# Altium PCB Key Panel 030602.PcbDoc
Units mm, origin at the board's own origin, x right, y up, seen from the top; angles counter-clockwise.
Board outline 85.73 x 53.97 mm, 2 copper layers (Top Layer, Bottom Layer); 46 components, 37 nets, 135 pads, 39 vias.
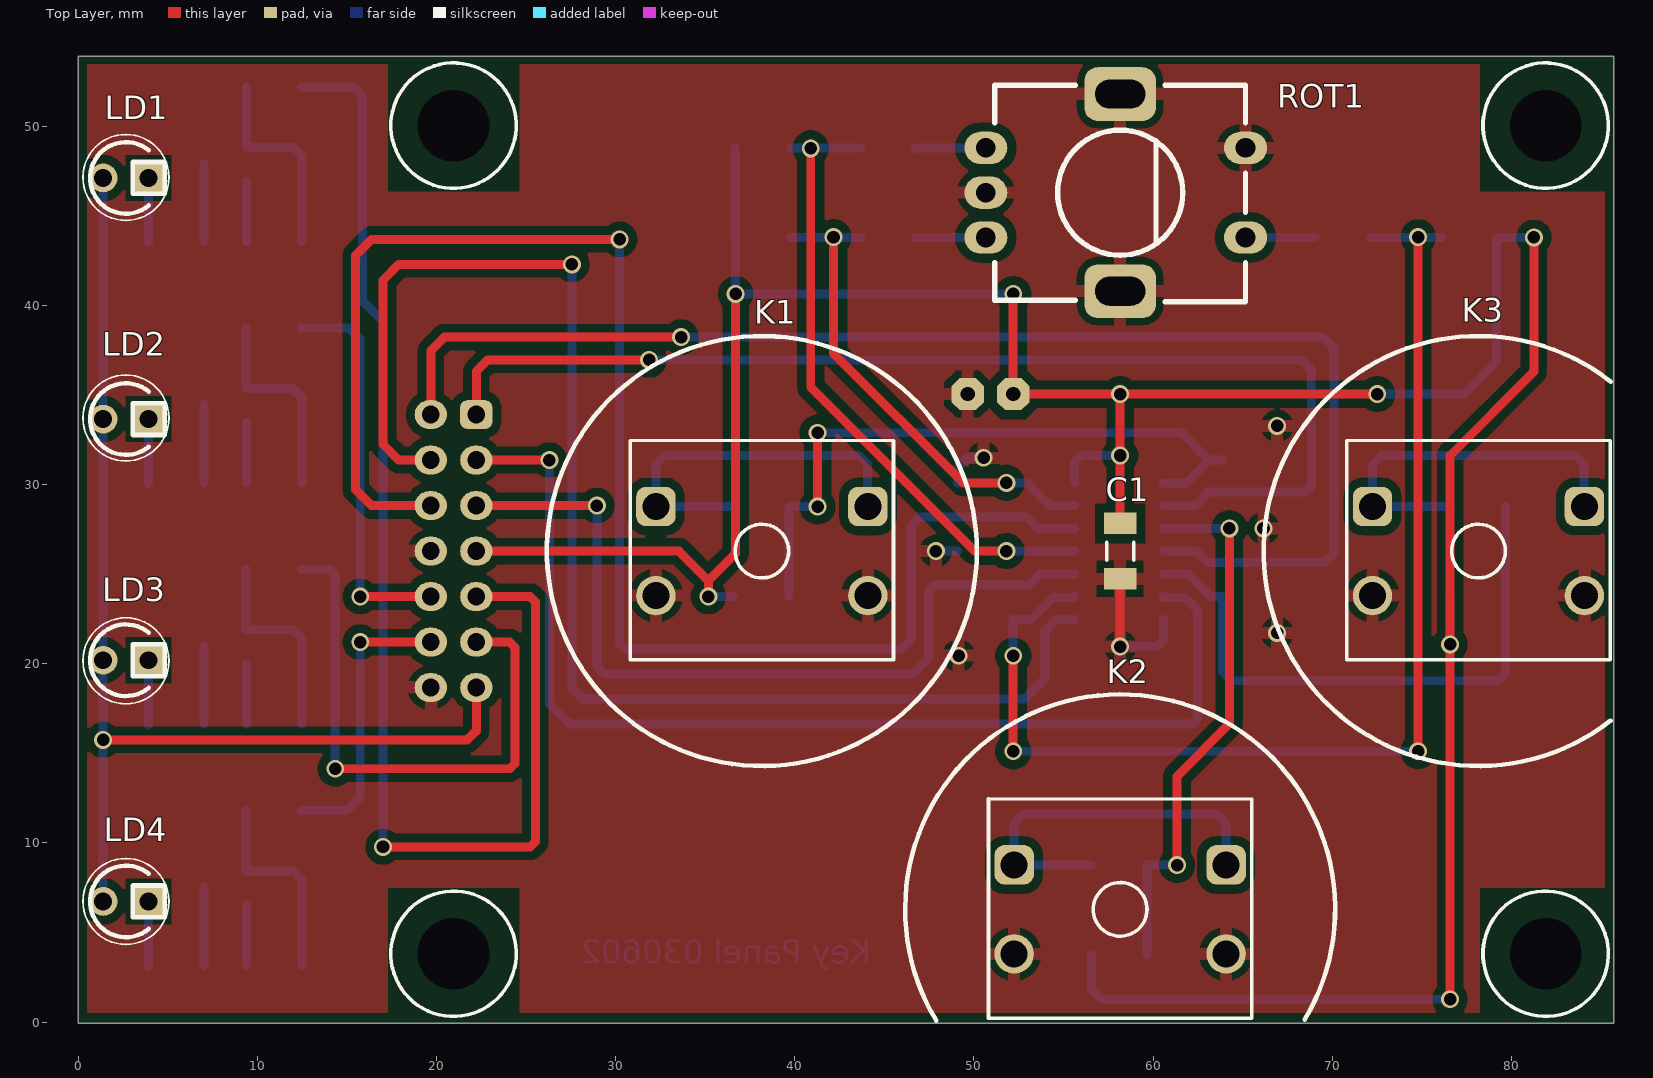
[diagram p0: Top Layer view]
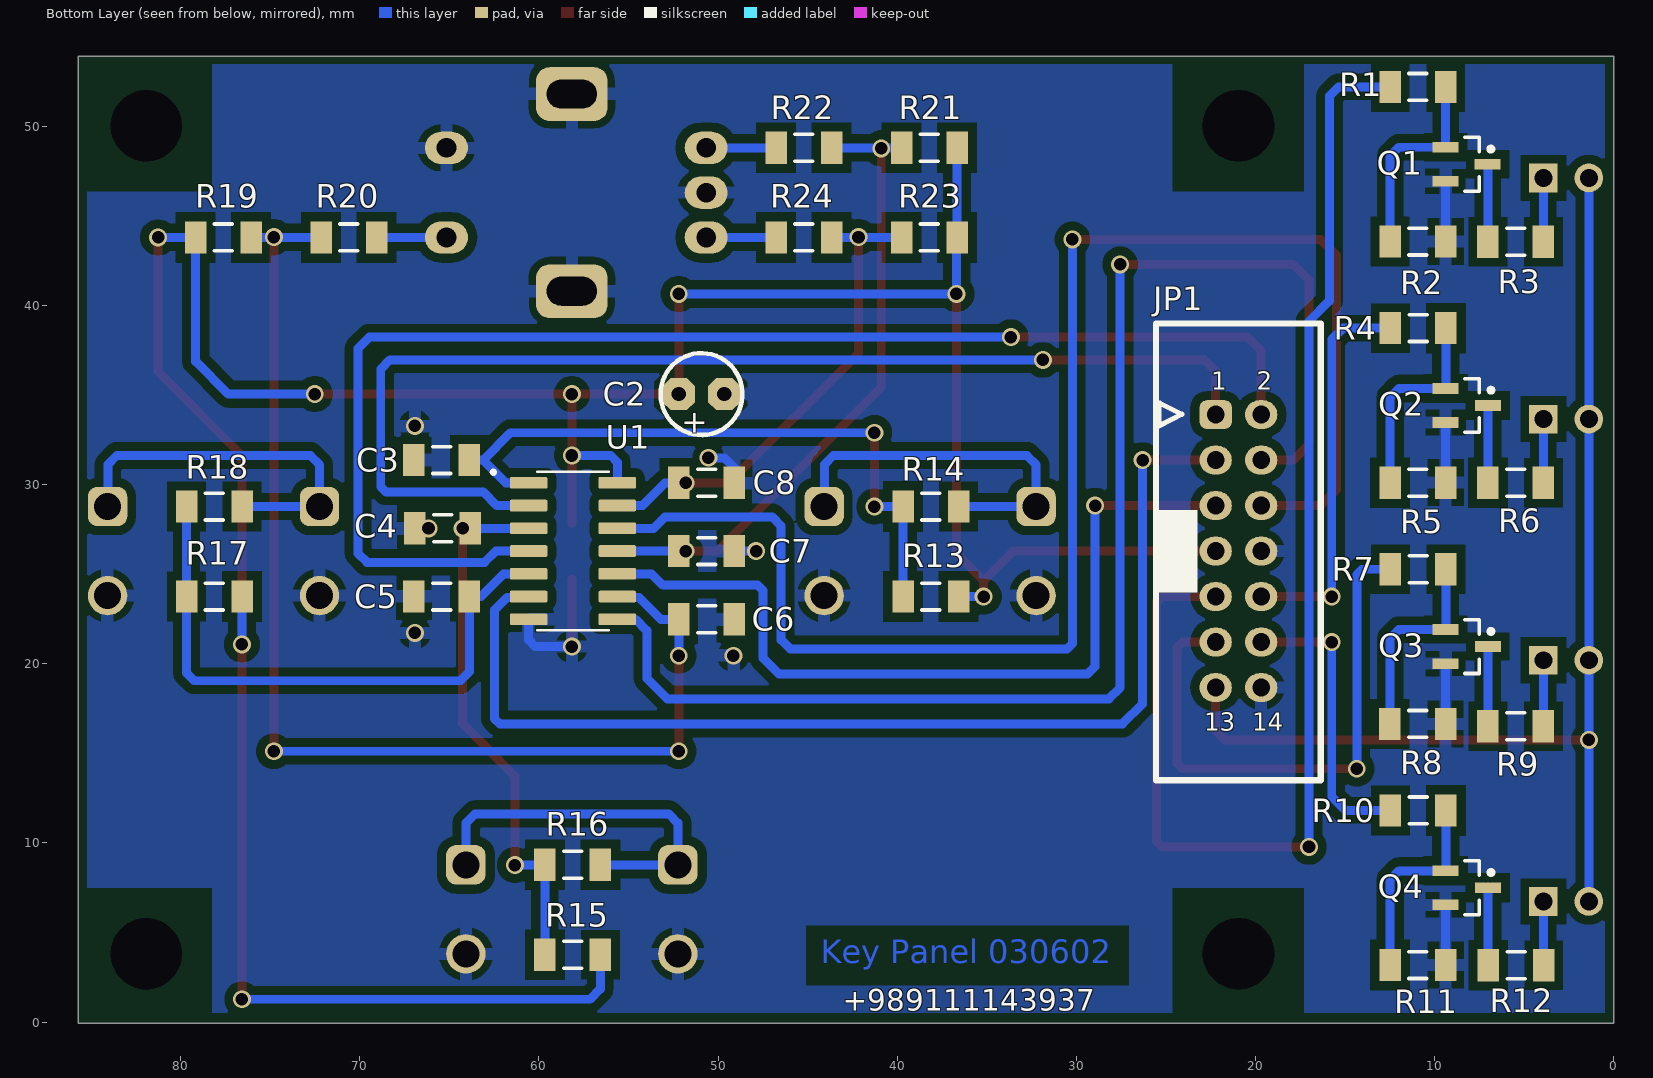
[diagram p1: Bottom Layer view, seen from below]
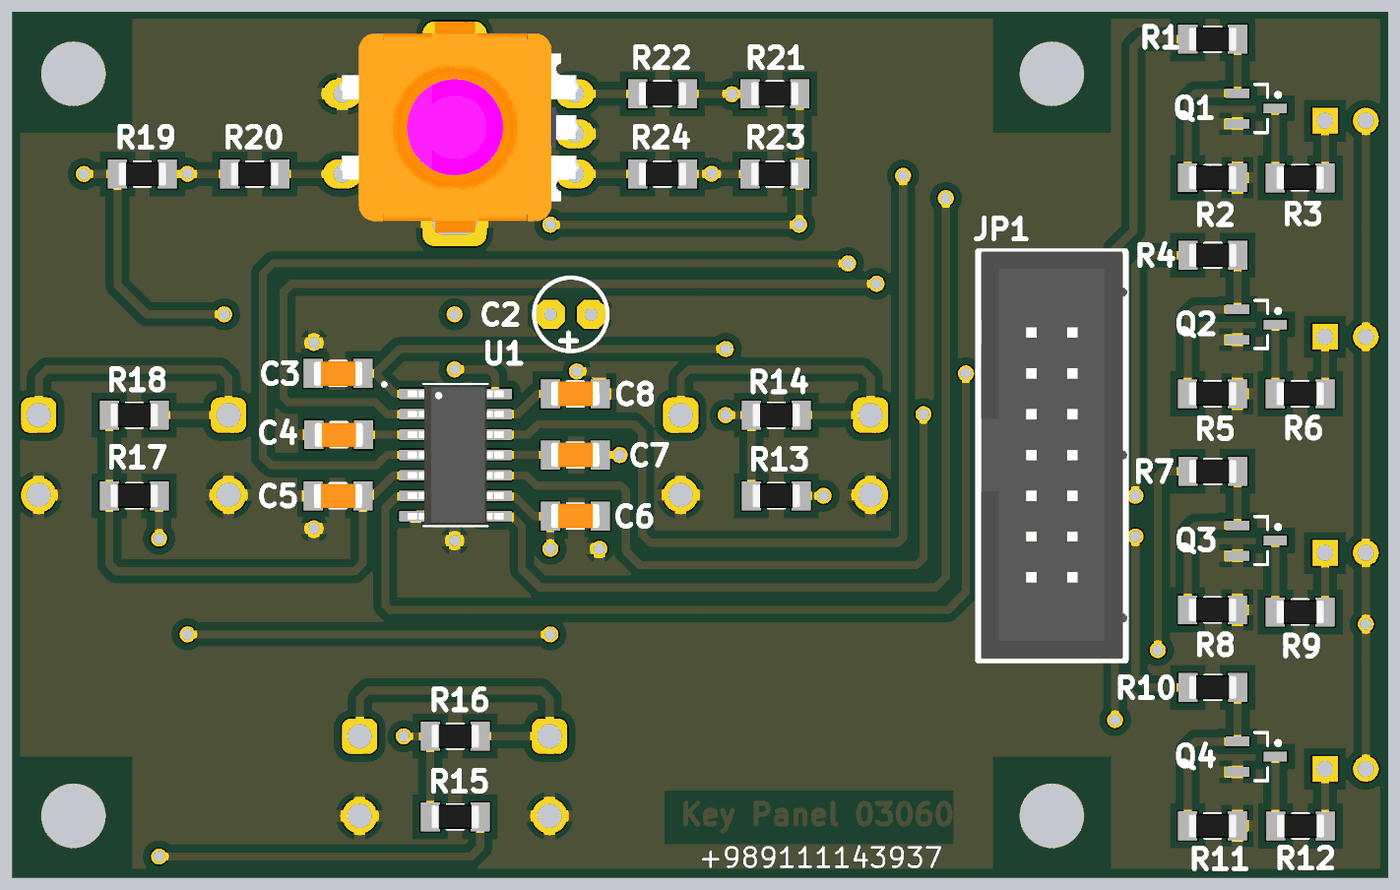
[diagram p2: 3D render of the assembled board from below, using the file's embedded part models]

## Layer stack, top to bottom
Top Solder: solder mask 0.0102, Solder Resist, Dk 3.5
Top Layer: signal copper 0.0356
Dielectric 1: dielectric 0.32, FR-4, Dk 4.8
Bottom Layer: signal copper 0.0356
Bottom Solder: solder mask 0.0102, Solder Resist, Dk 3.5

## Board outline
0,-0.059 0,53.916 85.725,53.916 85.725,-0.059

## Design rules (kind name [scope] priority, off if disabled: settings)
Clearance [All] p1: gap=0.5 ignorepadtopadclearanceinfootprint=FALSE
PlaneClearance [All] p1: clearance=0.4
PolygonConnect [All] p1: connectstyle=Relief reliefconductorwidth=0.7 reliefentries=4 polygonreliefangle="90 Angle" airgapwidth=0.4
RoutingVias [All] p1: holewidth=0.8 width=1 viastyle="Through Hole" minholewidth=0.5 minwidth=0.6 maxholewidth=1.8 maxwidth=2
SolderMaskExpansion [All] p1: expansion=0.102 istentingtop=FALSE
Width [All] p1: maxlimit=1 minlimit=0.3 preferedwidth=0.5 minimp=50.000000 maximp=50.000000 favimp=50.000000
29 further rules are at their usual default settings.

## Components (designator, comment, footprint, x,y, rotation, side; value= is the part's Value field where it differs from the comment)
C1 "100n" SMD_CAP_1206. 58.166,26.289 r90 top
C2 "10M/25" CAP1p 52.197,35.052 r180 bottom
C3 "100N" SMD_CAP_1206. 65.43,31.369 r180 bottom
C4 "100N" SMD_CAP_1206. 65.38,27.559 r180 bottom
C5 "100N" SMD_CAP_1206. 65.43,23.749 r180 bottom
C6 "100N" SMD_CAP_1206. 50.648,22.479 r0 bottom
C7 "100N" SMD_CAP_1206. 50.648,26.289 r0 bottom
C8 "100N" SMD_CAP_1206. 50.648,30.099 r0 bottom
JP1 "Key LED" IDC14-BOX 20.955,26.289 r180 bottom
K1 "Left" SW-12*14 38.166,26.289 r0 top locked
K2 "Left" SW-12*14 58.166,6.289 r0 top locked
K3 "Left" SW-12*14 78.166,26.289 r0 top locked
LD1 "Red" LED3 2.667,47.117 r0 top
LD2 "Red" LED3 2.667,33.655 r0 top
LD3 "Red" LED3 2.667,20.193 r0 top
LD4 "Red" LED3 2.667,6.731 r0 top
Q1 "2N2222" 2N2222 9.917,47.979 r270 bottom
Q2 "2N2222" 2N2222 9.911,34.517 r270 bottom
Q3 "2N2222" 2N2222 9.911,21.055 r270 bottom
Q4 "2N2222" 2N2222 9.911,7.593 r270 bottom
R1 "5K" "RES 1206" 10.935,52.197 r0 bottom
R2 "10K" "RES 1206" 10.941,43.567 r0 bottom
R3 "470R" "RES 1206" 5.486,43.561 r180 bottom
R4 "5K" "RES 1206" 10.929,38.735 r0 bottom
R5 "10K" "RES 1206" 10.941,30.105 r0 bottom
R6 "470R" "RES 1206" 5.486,30.099 r180 bottom
R7 "5K" "RES 1206" 10.929,25.273 r0 bottom
R8 "10K" "RES 1206" 10.947,16.637 r0 bottom
R9 "470R" "RES 1206" 5.486,16.51 r180 bottom
R10 "5K" "RES 1206" 10.929,11.811 r0 bottom
R11 "10K" "RES 1206" 10.941,3.181 r0 bottom
R12 "470R" "RES 1206" 5.461,3.175 r180 bottom
R13 "10K" "RES 1206" 38.125,23.749 r180 bottom
R14 "10K" "RES 1206" 38.125,28.774 r180 bottom
R15 "10K" "RES 1206" 58.125,3.749 r180 bottom
R16 "10K" "RES 1206" 58.125,8.774 r180 bottom
R17 "10K" "RES 1206" 78.125,23.749 r180 bottom
R18 "10K" "RES 1206" 78.125,28.774 r180 bottom
R19 "10K" "RES 1206" 77.619,43.796 r0 bottom
R20 "10K" "RES 1206" 70.618,43.796 r180 bottom
R21 "10K" "RES 1206" 38.213,48.796 r180 bottom
R22 "10K" "RES 1206" 45.214,48.796 r180 bottom
R23 "10K" "RES 1206" 38.213,43.796 r0 bottom
R24 "10K" "RES 1206" 45.214,43.796 r180 bottom
ROT1 "Alps Rotary" EC11 58.166,46.296 r270 top locked
U1 "CD40106BE" SOIC-14PIN 58.104,26.255 r180 bottom locked

## Footprints (in the part's own frame and the unit in brackets; to place one, negate y for a bottom-side part, rotate by r counter-clockwise, add the part's x,y. Pads: shape width x height; smd on the part's side, far side on the other; paste and mask are expansions set on the pad)
2N2222 [mm] "SOT_23"
  rect 0.6x1.45 smd: 1(-0.85,0.525) 2(1.05,0.525) 3(0.1,2.875)
  silkscreen extent -1.4,1.6 1.6,3.17, body extent -1.4,1 1.6,2.4, height 1.1
CAP1p [mm]
  oct 1.8x1.8 hole 0.8: 1(0,0) 2(2.54,0)
  silkscreen extent -1.02,-2.29 3.55,2.29
EC11 [mm]
  oval 1.8x2.4 hole 1.1: 1(-2.5,-7.5) 2(0,-7.5) 3(2.5,-7.5) 4(-2.5,7) 5(2.5,7)
  rrect50% 3x4 hole 1.6 slot 2.8 at 90 deg: 6(-5.5,0) 7(5.5,0)
  silkscreen extent -6,-7 6.1,7, body extent -6.54,-7.75 6.56,7.2, height 24.5
IDC14-BOX [mm]
  rrect50% 1.8x1.6 hole 1: 1(-1.27,7.62)
  oval 1.8x1.6 hole 1: 2(1.27,7.62) 3(-1.27,5.08) 4(1.27,5.08) 5(-1.27,2.54) 6(1.27,2.54) 7(-1.27,0) 8(1.27,0) 9(-1.27,-2.54) 10(1.27,-2.54) 11(-1.27,-5.08) 12(1.27,-5.08) 13(-1.27,-7.62) 14(1.27,-7.62)
  silkscreen extent -4.6,-12.8 4.6,12.7, body extent -4.4,-12.69 4.7,12.69, height 3.1
LED3 [mm]
  round 1.6 hole 1: 1(-1.27,0)
  rect 1.6x1.6 hole 1: 2(1.27,0)
  silkscreen extent -2,-2 2.16,2
"RES 1206" [mm] "Chip Resistor, 2-Leads, Body 3.2x1.6mm, IPC High Density _ (0.125 W)"
  rect 1.2x1.8 smd: 1(-1.549,0) 2(1.549,0)
  silkscreen extent -0.5,-0.75 0.5,0.75, body extent -1.52,-0.76 1.52,0.76, height 0.6
SMD_CAP_1206. [mm]
  rect 1.2x1.8 smd: 1(-1.549,0) 2(1.549,0)
  silkscreen extent -0.5,-0.75 0.5,0.75, body extent -1.52,-0.77 1.53,0.75, height 0.75
SOIC-14PIN [mm]
  rrect25% 2.1x0.65 smd: 1(-2.475,3.844) 2(-2.475,2.574) 3(-2.475,1.304) 4(-2.475,0.034) 5(-2.475,-1.236) 6(-2.475,-2.506) 7(-2.475,-3.776) 8(2.475,-3.776) 9(2.475,-2.506) 10(2.475,-1.236) 11(2.475,0.034) 12(2.475,1.304) 13(2.475,2.574) 14(2.475,3.844)
  silkscreen extent -4.54,-4.39 2,4.53, body extent -3,-4.29 3,4.36, height 1.75
SW-12*14 [mm]
  rrect50% 2.2x2.2 hole 1.5: 1(-5.916,2.485) 1(5.916,2.485)
  round 2.2 hole 1.5: 2(-5.916,-2.485) 2(5.916,-2.485)
  silkscreen extent -7.35,-6.07 7.35,6.17

## Part data
C1 C3 C4 C5 C6 C7 C8: library part C
C2: library part "Cap Pol1 _ SMD", "SMD Polarized Capacitor", LatestRevisionDate=17-Jul-2002, LatestRevisionNote="Re-released for DXP Platform.", PackageDescription="Polarized Capacitor (Radial); 2 Leads", PackageReference=RB7.6-15, Published=8-Jun-2000, Publisher="Altium Limited"
JP1: library part "Header 7X2", "Header, 7-Pin, Dual row", LatestRevisionDate=17-Jul-2002, LatestRevisionNote="Re-released for DXP Platform.", Publisher="Altium Limited"
K1 K2 K3: library part "Switch PB", "Push Button Switch", Foot Print="Switch - Push to On"
LD1 LD2 LD3 LD4: library part LED, "LED", Adding Date=1387/12/22, Color=Red, Designer="Saeid Jorablo", Organazation=ControTec, Size="SMD 1206"
Q1 Q2 Q3 Q4: library part N
R1 R2 R3 R4 R5 R6 R7 R8 R9 R10 R11 R12 R13 R14 R15 R16 R17 R18 R19 R20 R21 R22 R23 R24: library part Resistor, "Resistor", Power="1/8 W", Tolerance=5%
  R13 R14 R15 R16 R17 R18 R19 R20 R21 R22 R23 R24: Foot Print="RES 1206"
ROT1: library part AlpsRotary
U1: "CMOS Hex Schmitt Triggers 14-PDIP -55 to 125", Package="PDIP-14 Texas Instruments", Availability=Good, DigiKey-Purchase-URL=https://snapeda.com/shop?store=DigiKey&id=567726, MF="Texas Instruments", Mouser-Purchase-URL=https://snapeda.com/shop?store=Mouser&id=567726, MP=CD40106BE, Price=None, SnapEDA_Link=https://www.snapeda.com/parts/CD40106BE/Texas%20Instruments/view-part/567726/?ref=snap, Texas_Instruments-Purchase-URL=https://snapeda.com/shop?store=Texas+Instruments&id=567726

## Free pads (board coordinates)
  oval 3.5x3 hole 4: ""(20.955,3.81) ""(20.955,50.038) ""(81.915,3.81)
  round 3.5 hole 4: ""(81.915,50.038)

## Via types
v1: diameter 1, hole 0.7, Top Layer to Bottom Layer, 39 vias

## Nets (pads, with @x,y where several pads share a name; then routed paths per layer and width w, separated by ;. In a path a pad name is that pad's centre, name@x,y a point inside that pad or via, vN(x,y) a via of type N, cw(c..) or ccw(c..) an arc to the next point about the centre after c; other vN are vias at no path point)
3V3: C1.2 C2.1 JP1.7 R13.2 R15.2 R17.2 R19.2 R21.2 R23.1 U1.14 | length 178.9
  Top Layer w0.5: JP1.7 33.528,26.289 35.179,24.638 ; v1(35.179,23.749) 35.179,24.638 ; v1(36.703,40.64) 36.703,26.162 35.179,24.638 ; v1(52.197,40.64) C2.1 v1(58.166,35.052) ; C1.2 v1(58.166,31.623) v1(58.166,35.052) ; v1(72.517,35.052) v1(58.166,35.052) ; v1(76.581,1.27) v1(76.581,21.082) 76.581,31.623 81.261,36.303 v1(81.261,43.796)
  Bottom Layer w0.5: v1(35.179,23.749) R13.2 ; R21.2 R23.1 36.683,43.776 36.683,40.66 v1(36.703,40.64) v1(52.197,40.64) ; U1.14 55.629,31.245 56.007,31.623 v1(58.166,31.623) ; R15.2 56.576,1.844 57.15,1.27 v1(76.581,1.27) ; v1(72.517,35.052) 77.343,35.052 79.168,36.877 R19.2 v1(81.261,43.796) ; R17.2 76.579,23.747 76.579,21.084 v1(76.581,21.082)
GND: C1.1 C2.2 C3.1 C4.1 C5.1 C6.1 C7.1 C8.1 JP1.8 JP1.14 K1.2 K2.2 K3.2 Q1.2 Q2.2 Q3.2 Q4.2 R2.1 R5.1 R8.1 R11.1 ROT1.2 ROT1.4 ROT1.6 ROT1.7 U1.7 | length 24.7
  Top Layer w0.5: v1(58.166,20.955) C1.1
  Bottom Layer w0.5: Q3.2 9.392,20.005 9.392,16.643 R8.1 ; R11.1 Q4.2@9.392,6.543 ; R5.1 Q2.2@9.392,33.467 ; R2.1 Q1.2 ; v1(47.879,26.289) C7.1 ; C8.1 49.098,30.937 49.657,31.496 v1(50.546,31.496) ; v1(58.166,20.955) 60.201,20.955 60.579,21.333 U1.7
  other v1: 49.149,20.447 66.929,21.717 66.167,27.559 66.929,33.274
K1: C3.2 R13.1 R14.1 U1.1 | length 37
  Top Layer w0.5: v1(41.275,28.774) v1(41.275,32.893)
  Bottom Layer w0.5: R13.1 R14.1 v1(41.275,28.774) ; v1(41.275,32.893) 61.595,32.893 63.119,31.369 ; U1.1 61.849,30.099 63.119,31.369 ; C3.2 63.119,31.369
K2: C4.2 R15.1 R16.1 U1.3 | length 29.9
  Top Layer w0.5: v1(61.341,8.763) 61.341,13.716 64.262,16.637 v1(64.262,27.559)
  Bottom Layer w0.5: R15.1 R16.1 R16.1@59.685,8.764 ; R16.1@59.675,8.764 R16.1@59.685,8.764 ; R16.1@59.686,8.763 R16.1@59.685,8.764 ; U1.3 C4.2 ; v1@61.276,8.764 R16.1@59.685,8.764
K3: C5.2 R17.1 R18.1 U1.5 | length 33.5
  Bottom Layer w0.5: U1.5 61.976,25.019 63.246,23.749 C5.2 63.881,19.558 64.389,19.05 79.248,19.05 79.675,19.477 R18.1
K4: C6.2 R19.1 R20.1 U1.9 | length 66.5
  Top Layer w0.5: v1(52.197,15.113) v1(52.197,20.447) ; v1(74.803,15.113) v1(74.803,43.815)
  Bottom Layer w0.5: v1(52.197,15.113) v1(74.803,15.113) ; v1(52.197,20.447) C6.2 53.196,22.479 54.421,23.704 55.584,23.704 U1.9 ; R20.1 R19.1
KEY1: JP1.1 U1.2 | length 64.8
  Top Layer w0.5: JP1.1 22.225,36.322 22.86,36.957 v1(31.877,36.957)
  Bottom Layer w0.5: v1(31.877,36.957) 68.326,36.957 68.834,36.449 68.834,29.884 68.541,29.591 63.119,29.591 62.357,28.829 U1.2
KEY2: JP1.2 U1.4 | length 76
  Top Layer w0.5: JP1.2 19.685,37.465 20.447,38.227 v1(33.655,38.227)
  Bottom Layer w0.5: v1(33.655,38.227) 69.469,38.227 70.104,37.592 70.104,26.162 69.596,25.654 63.042,25.654 62.407,26.289 U1.4
KEY3: JP1.3 U1.6 | length 62.7
  Top Layer w0.5: JP1.3 v1(26.309,31.369)
  Bottom Layer w0.5: v1(26.309,31.369) 26.309,17.76 27.432,16.637 62.191,16.637 62.484,16.93 62.484,22.987 61.767,23.704 60.624,23.704 U1.6
KEY4: JP1.4 U1.8 | length 78.4
  Top Layer w0.5: JP1.4 17.907,31.369 17.018,32.258 17.018,41.402 17.907,42.291 v1(27.559,42.291)
  Bottom Layer w0.5: v1(27.559,42.291) 27.559,18.669 28.194,18.034 52.832,18.034 53.975,19.177 53.975,21.844 54.61,22.479 U1.8
LED1: JP1.9 R1.2 | length 71.4
  Top Layer w0.5: v1(17.018,9.779) 25.234,9.779 25.527,10.072 25.527,23.456 25.234,23.749 JP1.9
  Bottom Layer w0.5: R1.2 15.367,52.197 15.875,51.689 15.875,40.259 17.018,39.116 v1(17.018,9.779)
LED2: JP1.10 R4.2 | length 21.8
  Top Layer w0.5: v1(15.748,23.749) JP1.10
  Bottom Layer w0.5: R4.2 15.113,38.735 15.748,38.1 v1(15.748,23.749)
LED3: JP1.11 R7.2 | length 31.8
  Top Layer w0.5: v1(14.351,14.137) 24.091,14.137 24.384,14.43 24.384,20.916 24.091,21.209 JP1.11
  Bottom Layer w0.5: R7.2 14.058,25.273 14.351,24.98 v1(14.351,14.137)
LED4: JP1.12 R10.2 | length 16.2
  Top Layer w0.5: v1(15.748,21.209) JP1.12
  Bottom Layer w0.5: R10.2 14.986,11.811 15.748,12.573 v1(15.748,21.209)
NetK1_1: K1.1 R14.2 | length 21.2
  Bottom Layer w0.5: R14.2 32.25,28.774 32.25,31.107 32.766,31.623 43.561,31.623 44.069,31.115 44.069,28.787 K1.1@44.082,28.774
NetK2_1: K2.1 R16.2 | length 21.2
  Bottom Layer w0.5: R16.2 52.25,8.774 52.25,11.107 52.766,11.623 63.561,11.623 64.069,11.115 64.069,8.787 K2.1@64.082,8.774
NetK3_1: K3.1 R18.2 | length 21.2
  Bottom Layer w0.5: R18.2 72.25,28.774 72.25,31.107 72.766,31.623 83.561,31.623 84.069,31.115 84.069,28.787 K3.1@84.082,28.774
NetLD1_2: LD1.2 R3.2 | length 3.6
  Bottom Layer w0.5: R3.2@3.937,43.517 LD1.2
NetLD2_2: LD2.2 R6.2 | length 3.6
  Bottom Layer w0.5: R6.2@3.937,30.055 LD2.2
NetLD3_2: LD3.2 R9.2 | length 3.6
  Bottom Layer w0.5: R9.2@3.937,16.593 LD3.2
NetLD4_2: LD4.2 R12.2 | length 3.6
  Bottom Layer w0.5: R12.2@3.937,3.131 LD4.2
NetQ1_1: Q1.1 R1.1 R2.2 | length 11.4
  Bottom Layer w0.5: Q1.1@9.386,48.835 R1.1 ; Q1.1 12.004,48.829 12.491,48.342 R2.2
NetQ1_3: Q1.3 R3.1 | length 4.4
  Bottom Layer w0.5: R3.1 Q1.3@7.036,47.923
NetQ2_1: Q2.1 R4.1 R5.2 | length 11.4
  Bottom Layer w0.5: Q2.1@9.38,35.373 R4.1 ; Q2.1@9.392,35.361 12.004,35.361 12.491,34.874 R5.2@12.491,30.099
NetQ2_3: Q2.3 R6.1 | length 4.4
  Bottom Layer w0.5: R6.1 Q2.3@7.036,34.461
NetQ3_1: Q3.1 R7.1 R8.2 | length 11.4
  Bottom Layer w0.5: Q3.1@9.38,21.911 R7.1 ; Q3.1@9.392,21.899 12.004,21.899 12.491,21.412 R8.2@12.491,16.637
NetQ3_3: Q3.3 R9.1 | length 4.4
  Bottom Layer w0.5: R9.1@7.036,16.637 Q3.3@7.036,20.999
NetQ4_1: Q4.1 R10.1 R11.2 | length 11.4
  Bottom Layer w0.5: Q4.1@9.38,8.449 R10.1 ; Q4.1@9.392,8.437 12.004,8.437 12.491,7.95 R11.2@12.491,3.175
NetQ4_3: Q4.3 R12.1 | length 4.4
  Bottom Layer w0.5: R12.1@7.036,3.175 Q4.3@7.036,7.537
NetR20_2: R20.2 ROT1.5 | length 3.9
  Bottom Layer w0.5: ROT1.5 R20.2
NetR22_1: R22.1 ROT1.1 | length 3.9
  Bottom Layer w0.5: R22.1@46.736,48.768 R22.1 ROT1.1
NetR24_1: R24.1 ROT1.3 | length 3.9
  Bottom Layer w0.5: R24.1 ROT1.3
RKY1: JP1.5 U1.10 | length 47.1
  Top Layer w0.5: JP1.5 v1(28.956,28.829)
  Bottom Layer w0.5: v1(28.956,28.829) 28.956,19.851 29.376,19.431 46.609,19.431 47.498,20.32 47.498,24.091 47.791,24.384 53.086,24.384 53.721,25.019 U1.10
RKY2: JP1.6 U1.12 | length 87.9
  Top Layer w0.5: JP1.6 16.383,28.829 15.494,29.718 15.494,42.799 16.383,43.688 v1(30.226,43.688)
  Bottom Layer w0.5: v1(30.226,43.688) 30.226,21.121 30.519,20.828 45.974,20.828 46.482,21.336 46.482,27.686 46.99,28.194 52.959,28.194 53.594,27.559 U1.12
RY1: C7.2 R21.1 R22.2 U1.11 | length 35.4
  Top Layer w0.5: v1(40.894,48.768) 40.894,35.433 50.038,26.289 v1(51.816,26.289)
  Bottom Layer w0.5: R21.1 R22.2 ; C7.2 U1.11
RY2: C8.2 R23.2 R24.2 U1.13 | length 27
  Top Layer w0.5: v1(42.164,43.815) 42.164,37.338 49.403,30.099 v1(51.816,30.099)
  Bottom Layer w0.5: R23.2 R24.2 ; C8.2 52.959,30.099 54.229,28.829 U1.13
VP5: JP1.13 LD1.1 LD2.1 LD3.1 LD4.1 | length 63.8
  Top Layer w0.5: v1(1.397,15.748) 21.717,15.748 22.225,16.256 JP1.13
  Bottom Layer w0.5: LD4.1 LD3.1 LD2.1 LD1.1

## Polygon pours and split planes (outlines as drawn)
GND on Top Layer "NONET_L-01_P-001" (solid, pour order 2): 0.508,53.467 85.217,53.467 85.217,0.508 0.508,0.508
GND on Bottom Layer "NONET_L-01_P-001" (solid, pour order 0): 0.508,53.467 85.217,53.467 85.217,0.508 0.508,0.508

## Other copper
Top Layer:
  pour cut-out: 17.272,7.493 17.272,0.127 24.638,0.127 24.638,7.493
  pour cut-out: 78.232,7.493 78.232,0.127 85.598,0.127 85.598,7.493
  pour cut-out: 78.232,53.721 78.232,46.355 85.598,46.355 85.598,53.721
  pour cut-out: 17.272,53.721 17.272,46.355 24.638,46.355 24.638,53.721
Bottom Layer:
  pour cut-out: 17.272,7.493 17.272,0.127 24.638,0.127 24.638,7.493
  pour cut-out: 78.232,7.493 78.232,0.127 85.598,0.127 85.598,7.493
  pour cut-out: 78.232,53.721 78.232,46.355 85.598,46.355 85.598,53.721
  pour cut-out: 17.272,53.721 17.272,46.355 24.638,46.355 24.638,53.721
  text "Key Panel 030602" at 44.277,3.273 h1.3

## Silkscreen, mask and mechanical layers (free items; w line width, h text height)
Top Overlay:
  circle w0.254: c38.166,26.289 r12
  circle w0.1: c2.667,6.732 r2.4
  circle w0.1: c2.667,20.161 r2.4
  circle w0.1: c2.667,33.717 r2.4
  circle w0.1: c2.667,47.146 r2.4
  lines w0.2: 18.485,6.289 ccw(c20.955,3.81) 18.498,6.303 ; 18.485,52.517 ccw(c20.955,50.038) 18.498,52.531 ; 79.445,1.331 cw(c81.915,3.81) 79.458,1.317 ; 79.445,52.517 ccw(c81.915,50.038) 79.458,52.531
  lines w0.254: 47.906,0.066 cw(c58.166,6.289) 68.46,0.123 ; 85.548,16.828 cw(c78.166,26.289) 85.548,35.75
Bottom Overlay:
  text "+989111143937" at 43.053,0.635 h1.2
Mechanical 1:
  lines w0.1: 0,0 0,53.916 85.725,53.916 85.725,0 0,0

## Text inside footprints (layer, text, board x,y; h text height)
C2: Bottom Overlay "+" at 52.07,32.893 h1.3
JP1: Bottom Overlay "1" at 22.479,35.306 h1; Bottom Overlay "2" at 19.939,35.306 h1; Bottom Overlay "13" at 22.86,16.256 h1; Bottom Overlay "14" at 20.193,16.256 h1